# Altium PCB X-FLY(Mini).PcbDoc
Units mil, origin at the board's own origin, x right, y up, seen from the top; angles counter-clockwise.
Board outline 985 x 985 mil, 2 copper layers (Top Layer, Bottom Layer); 41 components, 47 nets, 207 pads, 45 vias.
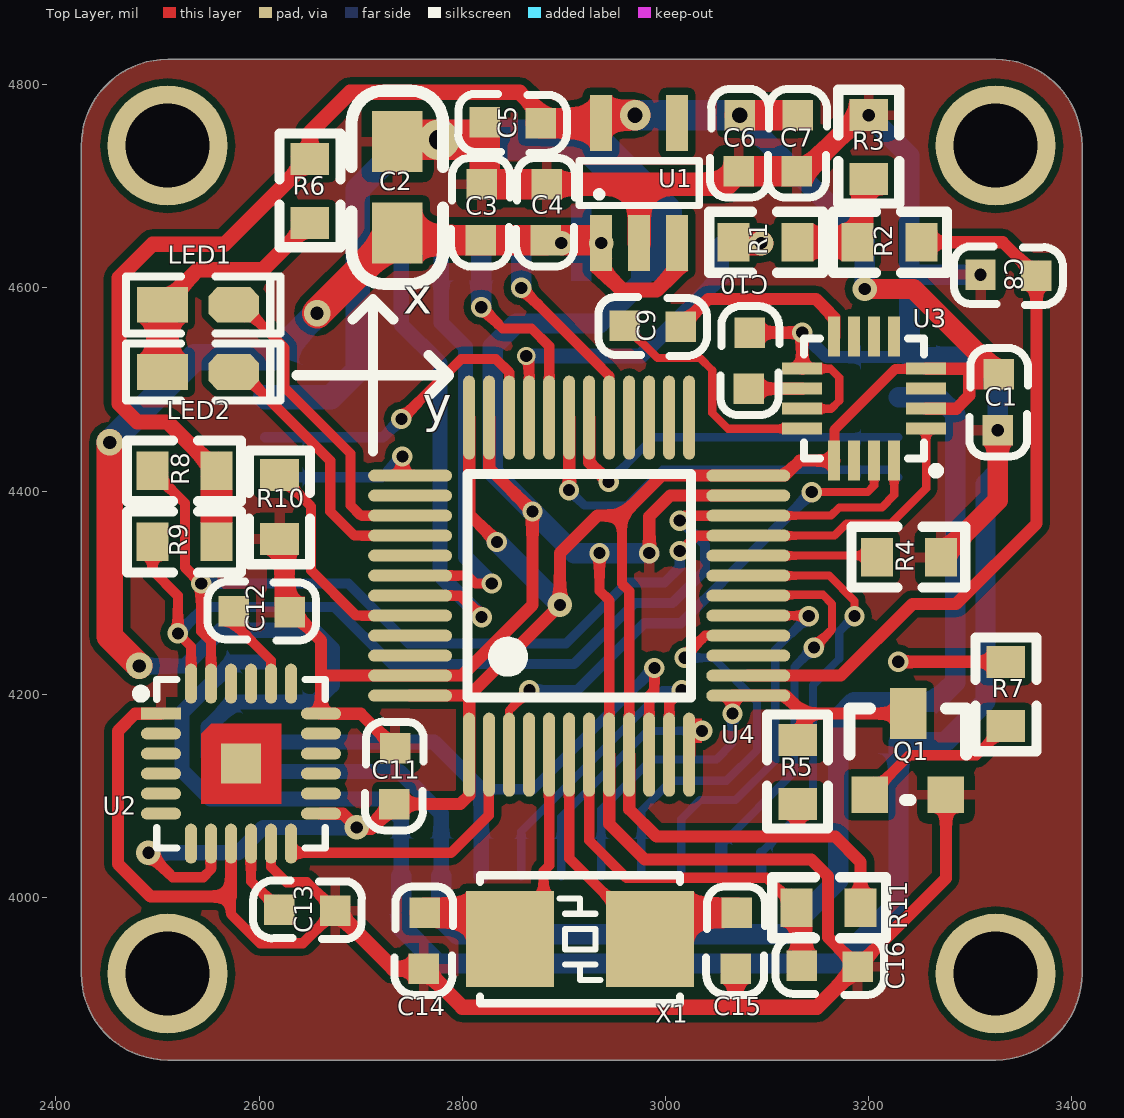
[diagram p0: Top Layer view]
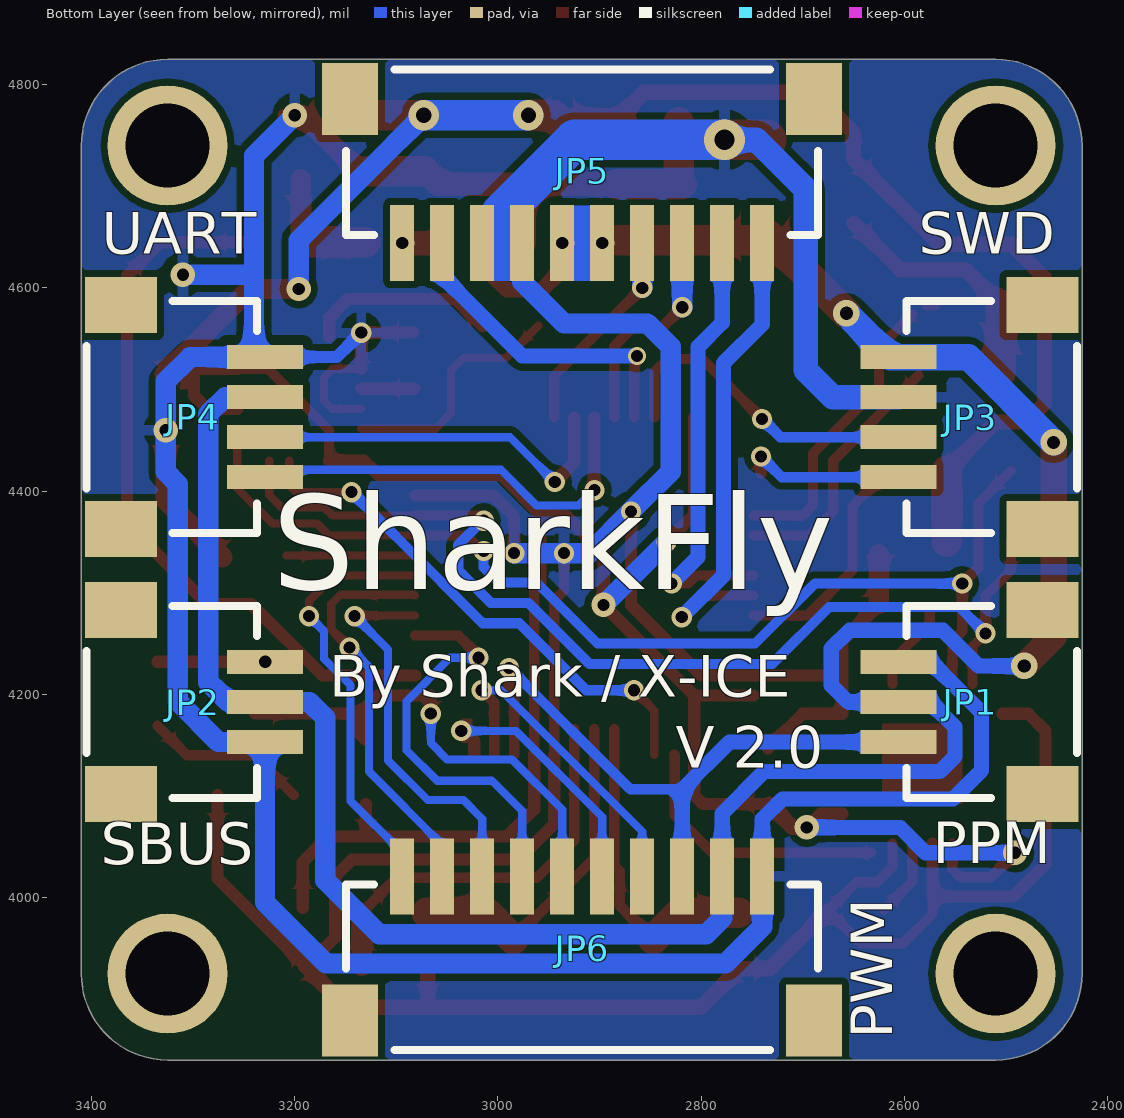
[diagram p1: Bottom Layer view, seen from below]
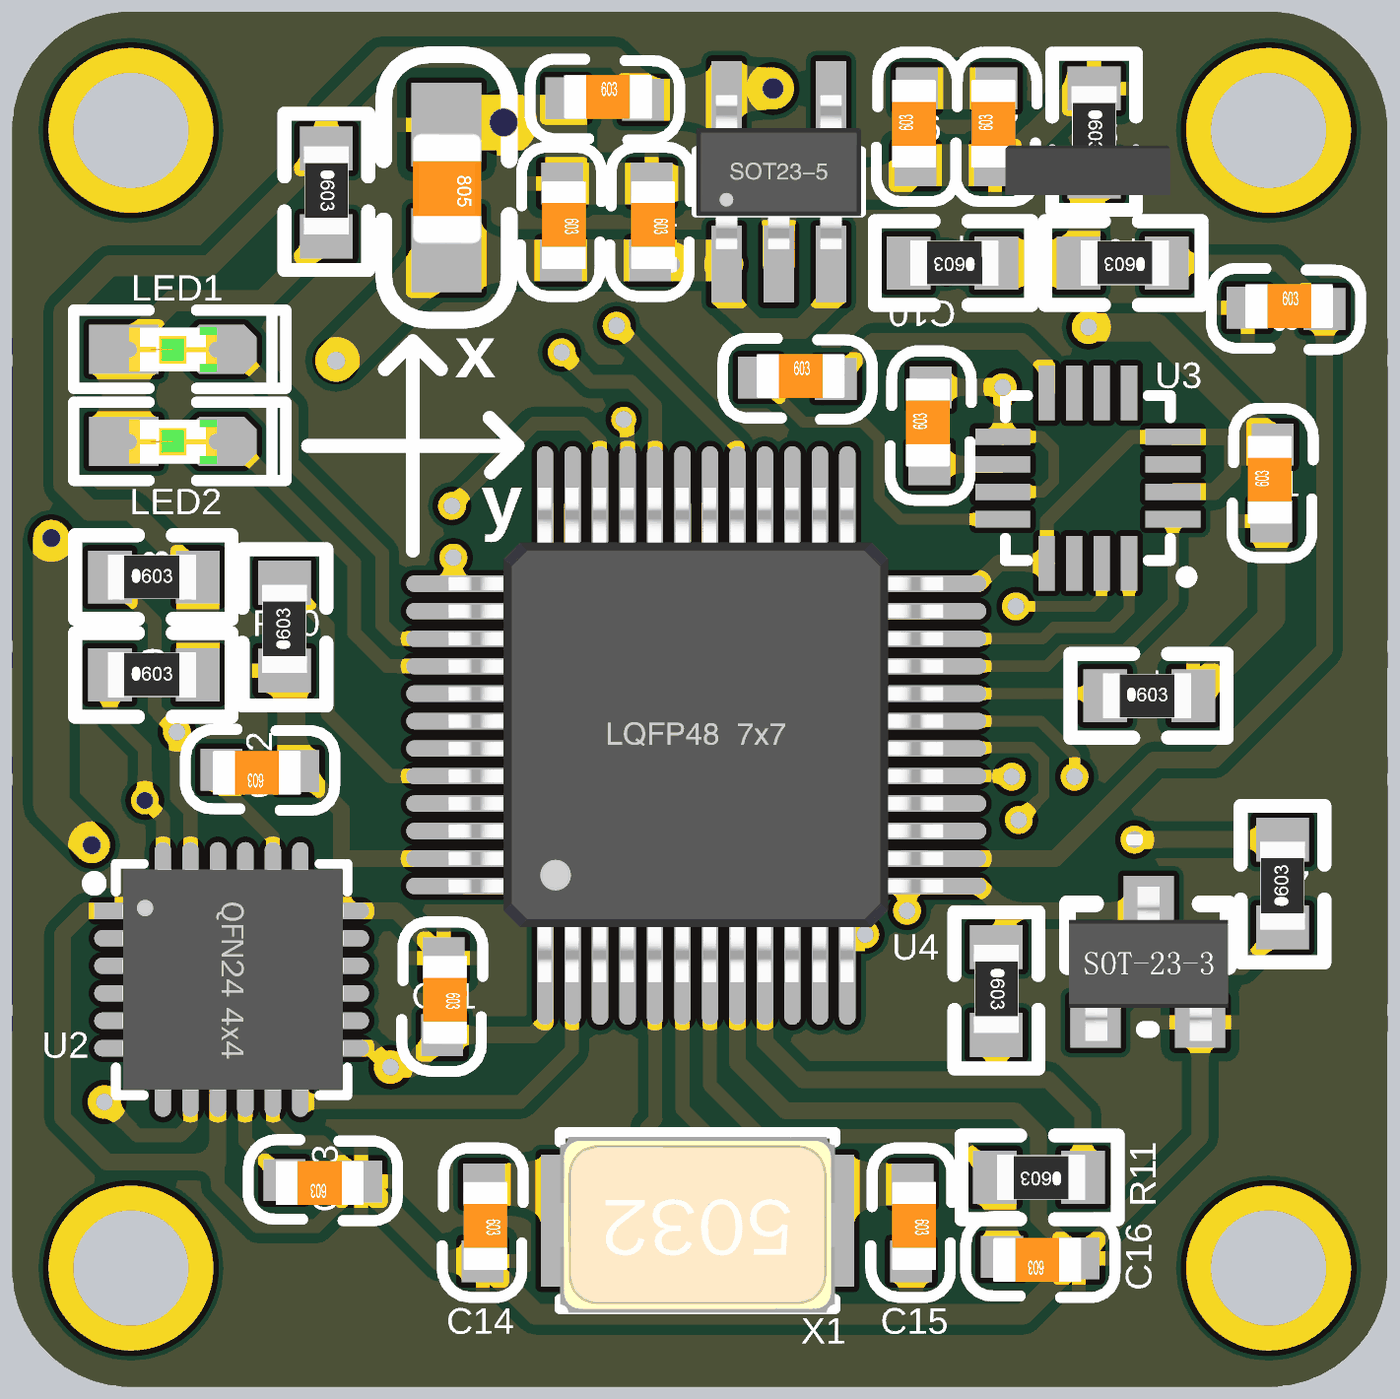
[diagram p2: 3D render of the assembled board from above, using the file's embedded part models]
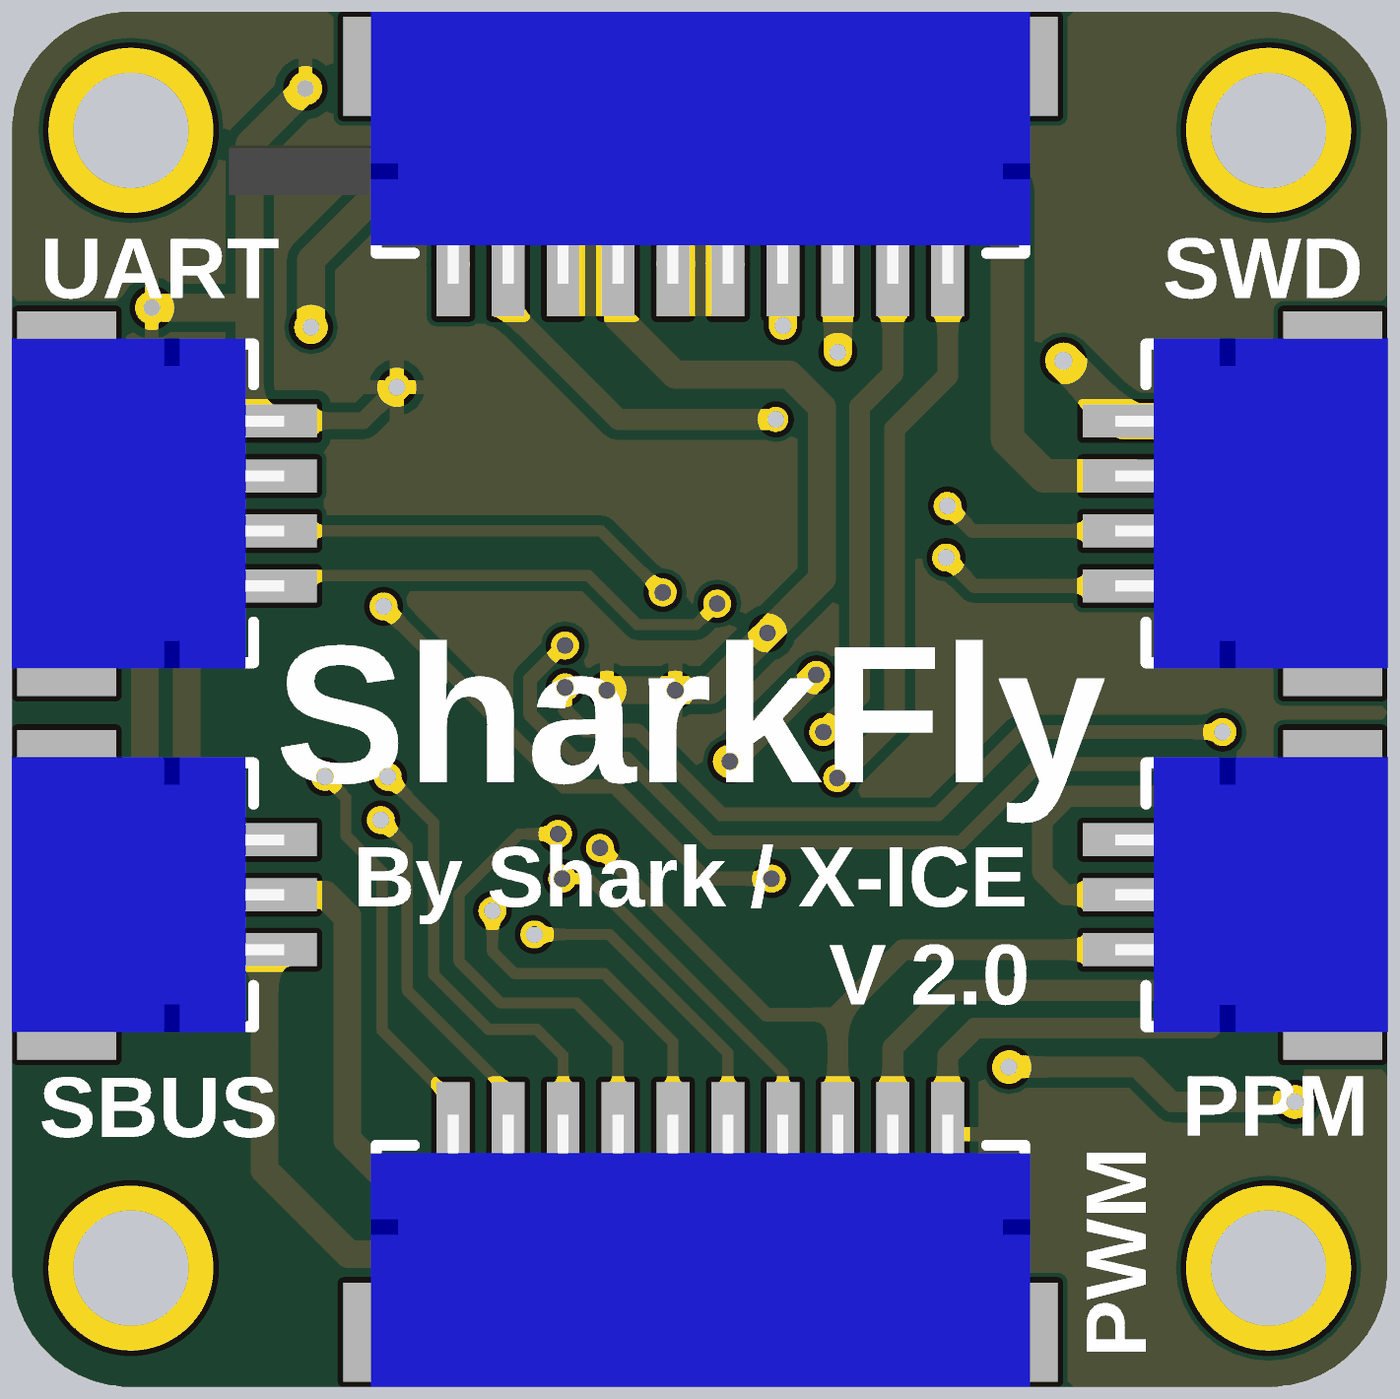
[diagram p3: 3D render of the assembled board from below, using the file's embedded part models]

## Layer stack, top to bottom
Top Solder: solder mask 0.4, Solder Resist, Dk 3.5
Top Layer: signal copper 1.4
Dielectric 1: dielectric 12.6, FR-4, Dk 4.8
Bottom Layer: signal copper 1.4
Bottom Solder: solder mask 0.4, Solder Resist, Dk 3.5

## Board outline
2425,3925 2425,4740 cw(c2510,4740) 2510,4825 3325,4825 cw(c3325,4740) 3410,4740 3410,3925 cw(c3325,3925) 3325,3840 2510,3840 cw(c2510,3925)

## Design rules (kind name [scope] priority, off if disabled: settings)
Clearance [All] p1: gap=7 ignorepadtopadclearanceinfootprint=FALSE
PolygonConnect [All] p1: connectstyle=Relief reliefconductorwidth=10 reliefentries=4 polygonreliefangle="90 Angle" airgapwidth=10
RoutingVias [All] p1: holewidth=15 width=30 viastyle="Through Hole" minholewidth=12 minwidth=18 maxholewidth=50 maxwidth=100
SolderMaskExpansion [All] p1: expansion=4
Width [All] p1: maxlimit=200 minlimit=8 preferedwidth=30
30 further rules are at their usual default settings.

## Components (designator, comment, footprint, x,y, rotation, side; value= is the part's Value field where it differs from the comment)
C1 "104" 0603C 3326.65,4459.79 r90 top
C2 "10uF" 0805C 2736.4,4743.29 r270 top
C3 "100nF" 0603C 2819.35,4702.21 r270 top
C4 "100nF" 0603C 2883.35,4702.21 r270 top
C5 "10uF" 0603C 2821.79,4763.35 r0 top
C6 "100nF" 0603C 3071.65,4714.79 r90 top
C7 "100nF" 0603C 3128.65,4714.79 r90 top
C8 "100nF" 0603C 3309.79,4613.35 r0 top
C9 "0.22uF" 0603C 2959.79,4563.35 r0 top
C10 "4.7uF" 0603C 3081.65,4500.79 r90 top
C11 "100nF" 0603C 2734.35,4147.21 r270 top
C12 "100nF" 0603C 2630.21,4280.65 r180 top
C13 "100nF" 0603C 2675.21,3986.65 r180 top
C14 "30pF" 0603C 2763.35,3985.21 r270 top
C15 "30pF" 0603C 3070.35,3985.21 r270 top
C16 "100nF" 0603C 3189.21,3931.65 r180 top
JP1 "PPM" SH1.0-3P-L 2534.87,4192.45 r90 bottom
JP2 "SBUS" SH1.0-3P-L 3300.13,4192.45 r270 bottom
JP3 "SWD下载" SH1.0-4P-L 2534.87,4472.76 r90 bottom
JP4 "USART1" SH1.0-4P-L 3300.13,4472.76 r270 bottom
JP5 "SH1.0-10P" SH1.0-10P-L 2917,4715 r0 bottom
JP6 "PWM" SH1.0-10P-L 2917,3950 r180 bottom
LED1 "蓝色" "LED 0603B" 2540,4583 r0 top
LED2 "绿色" "LED 0603G" 2540,4517 r0 top
Q1 "NPN" SOT-23 3236,4136 r0 top
R1 "10K" 0603R 3129.99,4645 r180 top
R2 "10K" 0603R 3251.99,4645 r180 top
R3 "1K" 0603R 3200,4770 r270 top
R4 "10K" 0603R 3208,4335 r0 top
R5 "10K" 0603R 3130,4154.99 r270 top
R6 "10K" 0603R 2650,4727 r270 top
R7 "1K" 0603R 3335,4169 r90 top
R8 "10K" 0603R 2495.01,4420 r0 top
R9 "10K" 0603R 2495.01,4350 r0 top
R10 "10K" 0603R 2620,4353 r90 top
R11 "10K" 0603R 3191.99,3990 r180 top
U1 "SPX3819" SOT23-5 2936.68,4644.14 r0 top
U2 "MPU6050" "QFN24 4x4" 2582.16,4131.74 r270 top
U3 "HMC5883" LPCC_16_0.5MM 3195.53,4490.98 r180 top
U4 "STM32F103C8T6" "LQFP48 7X7" 2915,4307 r0 top locked
X1 "8M" "OSC 5032-2P" 2915.9,3959 r180 top

## Footprints (in the part's own frame and the unit in brackets; to place one, negate y for a bottom-side part, rotate by r counter-clockwise, add the part's x,y. Pads: shape width x height; smd on the part's side, far side on the other; paste and mask are expansions set on the pad)
0603C [mil]
  rect 30x30 smd: 1(0.21,-0.35) 2(55.21,-1.35)
  silkscreen extent -26,-30 81,28, body extent -1,-15 62,17, height 12
0603R [mm]
  rect 0.8x0.965 smd: 1(0,0) 2(1.6,0)
  silkscreen extent -0.64,-0.76 2.21,0.76, body extent -0.04,-0.41 1.56,0.41, height 0.45
0805C [mil]
  rect 60x50 smd: 1(-0.71,-0.4) 2(89.29,-0.4)
  silkscreen extent -51,-45 139,45, body extent 6,-25 84,25, height 31
"LED 0603B" [mil] "蓝色0603LED"
  rect 50x35 smd: 1(-35,0.26)
  oct 50x35 smd: 2(35,0.26)
  silkscreen extent -71,-28 81,28, body extent -31,-16 32,16, height 24
"LED 0603G" [mil] "绿色0603LED"
  rect 50x35 smd: 1(-35,0.26)
  oct 50x35 smd: 2(35,0.26)
  silkscreen extent -71,-28 81,28, body extent -31,-16 32,16, height 24
LPCC_16_0.5MM [mm]
  rect 1x0.3 smd: 1(-1.55,0.75) 2(-1.55,0.25) 3(-1.55,-0.25) 4(-1.55,-0.75) 9(1.55,-0.75) 10(1.55,-0.25) 11(1.55,0.25) 12(1.55,0.75)
  rect 0.3x1 smd: 5(-0.75,-1.55) 6(-0.25,-1.55) 7(0.25,-1.55) 8(0.75,-1.55) 13(0.75,1.55) 14(0.25,1.55) 15(-0.25,1.55) 16(-0.75,1.55)
  silkscreen extent -1.87,-1.5 1.5,1.87, body extent -1.5,-1.5 1.5,1.5, height 0.9
"LQFP48 7X7" [mm]
  oval 0.3x2.1 smd: 1(-2.75,-4.227) 2(-2.25,-4.227) 3(-1.75,-4.227) 4(-1.25,-4.227) 5(-0.75,-4.227) 6(-0.25,-4.227) 7(0.25,-4.227) 8(0.75,-4.227) 9(1.25,-4.227) 10(1.75,-4.227) 11(2.25,-4.227) 12(2.75,-4.227) 25(2.75,4.202) 26(2.25,4.202) 27(1.75,4.202) 28(1.25,4.202) 29(0.75,4.202) 30(0.25,4.202) 31(-0.25,4.202) 32(-0.75,4.202) 33(-1.25,4.202) 34(-1.75,4.202) 35(-2.25,4.202) 36(-2.75,4.202)
  oval 2.1x0.3 smd: 13(4.227,-2.75) 14(4.227,-2.25) 15(4.227,-1.75) 16(4.227,-1.25) 17(4.227,-0.75) 18(4.227,-0.25) 19(4.227,0.25) 20(4.227,0.75) 21(4.227,1.25) 22(4.227,1.75) 23(4.227,2.25) 24(4.227,2.75) 37(-4.227,2.75) 38(-4.227,2.25) 39(-4.227,1.75) 40(-4.227,1.25) 41(-4.227,0.75) 42(-4.227,0.25) 43(-4.227,-0.25) 44(-4.227,-0.75) 45(-4.227,-1.25) 46(-4.227,-1.75) 47(-4.227,-2.25) 48(-4.227,-2.75)
  silkscreen extent -2.79,-2.79 2.79,2.79, body extent -4.51,-4.5 4.5,4.5, height 1.45
"OSC 5032-2P" [mm]
  rect 2.2x2.4 smd: 1(-1.75,0) 2(1.75,0)
  silkscreen extent -2.5,-1.6 2.5,1.6, body extent -2.5,-1.52 2.5,1.68, height 0.86
"QFN24 4x4" [mm]
  rect 0.3x1 smd: 1(-1.25,-2)
  oval 0.3x1 smd: 2(-0.75,-2) 3(-0.25,-2) 4(0.25,-2) 5(0.75,-2) 6(1.25,-2) 13(1.25,2) 14(0.75,2) 15(0.25,2) 16(-0.25,2) 17(-0.75,2) 18(-1.25,2)
  oval 1x0.3 smd: 7(2,-1.25) 8(2,-0.75) 9(2,-0.25) 10(2,0.25) 11(2,0.75) 12(2,1.25) 19(-2,1.25) 20(-2,0.75) 21(-2,0.25) 22(-2,-0.25) 23(-2,-0.75) 24(-2,-1.25)
  rect 1x1 smd: 25(0,0)
  Top Layer region: -1,1 1,1 1,-1 -0.75,-1 -1,-0.75
  silkscreen extent -2.11,-2.6 2.11,2.11, body extent -2.01,-1.98 2.01,2.04, height 0.98
SH1.0-3P-L [mm]
  rect 1.4x1.8 smd: 0(-2.3,-1.8) 0(2.3,-1.8)
  rect 0.6x1.9 smd: 1(-1,1.8) 2(0,1.8) 3(1,1.8)
  silkscreen extent -2.4,-2.67 2.4,1.6, body extent -2.5,-2.79 2.5,2.16, height 2.96
SH1.0-4P-L [mm]
  rect 1.4x1.8 smd: 0(-2.8,-1.8) 0(2.8,-1.8)
  rect 0.6x1.9 smd: 1(-1.5,1.8) 2(-0.5,1.8) 3(0.5,1.8) 4(1.5,1.8)
  silkscreen extent -2.9,-2.67 2.9,1.6, body extent -3,-2.79 3,2.16, height 2.96
SH1.0-10P-L [mm]
  rect 1.4x1.8 smd: 0(-5.8,-1.8) 0(5.8,-1.8)
  rect 0.6x1.9 smd: 1(-4.5,1.8) 2(-3.5,1.8) 3(-2.5,1.8) 4(-1.5,1.8) 5(-0.5,1.8) 6(0.5,1.8) 7(1.5,1.8) 8(2.5,1.8) 9(3.5,1.8) 10(4.5,1.8)
  silkscreen extent -5.9,-2.54 5.9,1.6, body extent -6,-2.79 6,2.16, height 2.96
SOT23-5 [mm]
  rect 0.55x1.4 smd: 1(0,0) 2(0.95,0) 3(1.9,0) 4(1.9,3) 5(0,3)
  silkscreen extent -0.55,0.94 2.45,2.06, body extent -0.55,0.27 2.45,3.08, height 1.15
SOT-23 [mil]
  rect 36x36 smd: B(-35,-35) E(40,-35)
  rect 36x50 smd: C(3,45)
  silkscreen extent -55,-40 60,50, body extent -54,-48 60,62, height 47

## Part data
C1 C2 C3 C4 C5 C6 C7 C8 C9 C10 C11 C12 C13 C14 C15 C16: library part CAP, "无极性电容"
JP1 JP2: library part "Header 3", "3P接插件", BOM名称=3P接插件, 厂商=JST
JP3 JP4: library part "Header 4", "4P接插件", BOM名称=4P接插件, 厂商=JST
JP5 JP6: library part "Header 10", "10P接插件", BOM名称=10P接插件, 厂商=JST
LED1 LED2: library part LED-SMD, "贴片LED", BOM名称=贴片LED, 学习资源=www.ooocke.com, 版权归属=源创客
Q1: "NPN三极管"
R1 R2 R3 R4 R5 R6 R7 R8 R9 R10 R11: library part RES
X1: library part XTAL-2P, "2脚无源脚晶振"

## Free pads (board coordinates)
  round 118.11 hole 82.68: 1(2510,4740) 2(3325,4740) 3(2510,3925) 4(3325,3925)

## Via types
v1: diameter 20, hole 12, Top Layer to Bottom Layer, 28 vias
v2: diameter 24, hole 12, Top Layer to Bottom Layer, 10 vias
v3: diameter 26, hole 13, Top Layer to Bottom Layer, 3 vias
v4: diameter 30, hole 15, Top Layer to Bottom Layer, 2 vias
v5: diameter 18, hole 12, Top Layer to Bottom Layer, 1 vias
v6: diameter 40, hole 20, Top Layer to Bottom Layer, 1 vias

## Nets (pads, with @x,y where several pads share a name; then routed paths per layer and width w, separated by ;. In a path a pad name is that pad's centre, name@x,y a point inside that pad or via, vN(x,y) a via of type N, cw(c..) or ccw(c..) an arc to the next point about the centre after c; other vN are vias at no path point)
3.3V-A: C1.2 C5.2 C6.2 C7.2 C11.2 R5.2 R6.1 R8.2 R9.2 R11.1 U1.5 U2.8 U2.13 U3.2 U3.4 U3.13 U4.1 U4.9 U4.24 U4.36 U4.48 | length 3697.2
  Top Layer w10: v2(2491,4044) 2515,4020 2545,4020 2552.63,4027.63 U2.8 ; 2957,4376 2957,4309 2964.21,4301.79 U4.9 ; U3.13 3166.19,4430.14 3166.19,4460.19 3226.31,4520.31 3235.93,4520.31 3236.12,4520.5 U3.4
  Top Layer w12: U2.13 2682.47,4082.53 v2(2696,4069) ; C11.2 2798,4092 2806.73,4100.73 U4.1 2806.73,4197 ; U4.48 2806.73,4198.73 v2(2896,4288) 2896,4339 2933,4376 2957,4376 2996.27,4415.27 U4.24 3117.27,4415.27 3132,4430 U3.13 U3.13 ; U4.36 2806.73,4377.27 v1(2834,4350) ; U4.9 2964.21,4086.79 2991,4060 3129,4060 ; R5.2 3130,4061 3129,4060 ; R11.1 3192,4035 3167,4060 3129,4060 ; U3.2 3286.13,4481.13 3299,4494 3299,4519.5 3298,4520.5 U3.4
  Top Layer w15: R8.2 2510,4468 2480,4468 2462,4486 2462,4610 2495,4643 2566,4643 R6.1 2650,4753 2689.5,4792.5 2856.5,4792.5 2877,4772 C5.2 ; v2(2696,4069) 2710,4069 C11.2 ; U1.5@2936.44,4762 U1.5
  Top Layer w20: v2(3196,4599) 3244,4599 C1.2
  Top Layer w30: R9.2 R8.2 ; C5.2 U1.5@2936.44,4762 ; U1.5@2944.44,4770 v4(2970,4770) ; v4(3073,4770) C7.2
  Bottom Layer w15: v2(2491,4044) 2579,4044 2604,4069 v2(2696,4069)
  Bottom Layer w20: v1(2834,4350) v2(2896,4288) ; v4(3073,4770) 3196,4647 v2(3196,4599)
  Bottom Layer w30: v4(2970,4770) v4(3073,4770)
ADC_IN2: U4.15
BEEP_IN: JP5.9 U4.33 | length 318.5
  Top Layer w10: v5(2863,4533) 2865.79,4530.21 U4.33
  Bottom Layer w15: v5(2863,4533) 2976,4533 3054.8,4611.8 JP5.9
FLASH_CS: U4.25
FLASH_MISO: U4.27
FLASH_MOSI: U4.28
FLASH_SCK: U4.26
GND: C1.1 C2.1 C3.1 C4.1 C5.1 C6.1 C7.1 C8.1 C10.2 C11.1 C12.1 C13.1 C14.2 C15.2 C16.1 JP1.3 JP2.3 JP3.3 JP4.1 JP5.7 JP5.8 JP6.10 Q1.E R3.1 R4.2 R10.1 U1.2 U2.1 U2.9 U2.11 U2.18 U3.9 U3.11 U4.8 U4.23 U4.35 U4.47 | length 7140.9
  Top Layer w8: U3.11 3134.64,4481 3163,4481 3171,4489 3171,4512 3162.5,4520.5 U3.9
  Top Layer w10: 2572.32,4001 2572.32,3983.68 2601,3955 2643,3955 C13.1 2647,4015 2627,4015 2611.68,4030.32 U2.11 ; 2660.9,4221 2663.48,4218.42 ; v1(2935,4339) 2935,4302 2944.53,4292.47 U4.8
  Top Layer w12: U2.1 2477.95,4180.95 2461,4164 2461,4033 2493,4001 2572.32,4001 U2.9 ; C12.1@2625,4289 2660.9,4253.1 2660.9,4221 U2.18 2700.05,4180.95 C11.1 ; 2663.48,4218.42 U4.47 2799.55,4218.42 2869,4287.87 v1(2869,4380) 2826.42,4422.58 U4.35 ; U4.8 2944.53,4072.47 2979.46,4037.54 3143.46,4037.54 3160,4021 3160,3961 C16.1 3276,4019 Q1.E ; v1(2984,4339) 2984,4375 3004.58,4395.58 U4.23 ; C10.2 v1(3134.5,4556) U3.9 ; v2(3200,4770) R3.1@3211,4770
  Top Layer w15: C13.1 2732,3930 C14.2 2800,3892 3149,3892 C16.1 ; 3069,3895 C15.2
  Top Layer w20: C12.1@2625,4289 R10.1@2625,4338 ; C7.1 3137,4715 3192,4770 v2(3200,4770) ; R4.2 3327,4391.01 v2(3327,4460)
  Top Layer w23: C4.1 2974.09,4702 ; U1.2 2974.09,4702 ; C6.1 3059,4702 2974.09,4702
  Top Layer w30: C5.1 2822,4705 C3.1 C4.1 ; C6.1 C7.1
  Top Layer w40: C2.1@2736,4745.71 v6(2777,4745.71) 2816,4745.71
  Bottom Layer w12: v1(3134.5,4556) 3158.5,4532 3229.09,4532 JP4.1
  Bottom Layer w15: JP1.3 2573.82,4231.82 2524,4182 2524,4125 2552,4097 2720,4097 2739.84,4077.16 JP6.10
  Bottom Layer w20: JP6.10 2739.84,3971.16 2776,3935 3169,3935 3229.27,3995.27 JP2.3 3275.08,4153.08 3315,4193 3315,4407 3327,4419 v2(3327,4460) 3327,4508 3303,4532 3240,4532 3240,4614 ; JP5.7 2976.05,4606.06 2935,4565 2853,4565 2830,4542 2830,4419 v1(2869,4380) 2910,4339 v1(2935,4339) v1(2984,4339) ; v2(3200,4770) 3240,4730 3240,4614 ; v2(3310,4613) 3241,4613 3240,4614
  Bottom Layer w24: JP3.3 2670.45,4492.45 2697,4519 2697,4697 2745.71,4745.71 v6(2777,4745.71)
  Bottom Layer w40: v6(2777,4745.71) 2924.29,4745.71 2996,4674 2996,4644
LED0: LED1.2 U4.39 | length 299.4
  Top Layer w10: LED1.2@2570,4583 LED1.2@2578,4583 ; LED1.2@2592,4574 2625,4541 2625,4502 2690,4437 2690,4386 2700.1,4375.9 U4.39
LED1: LED2.2 U4.40 | length 257.2
  Top Layer w10: LED2.2@2586,4514 2670,4430 2670,4380 2693.79,4356.21 U4.40
MAG_DRDY: U3.15 U4.3 | length 519
  Top Layer w8: U4.3 2846.1,4184.1 v1(2866,4204) ; v1(3144,4399) 3199,4399 3205.37,4405.37 U3.15
  Bottom Layer w10: v1(2866,4204) 2913,4204 2979,4270 3015,4270 3021,4276 ; 3021.04,4276 3056,4310.96 ; 3056,4311 v1(3144,4399)
MPU_INT: U2.12 U4.2 | length 268.1
  Top Layer w10: U2.12@2633,4044 2789,4044 2826,4081 2826,4140.17 U4.2
NetC9_1: C9.1 U3.12 | length 241.2
  Top Layer w8: C9.1 2992,4531 3034,4531 3046,4519 3046,4477 3061.55,4461.45 U3.12
NetC9_2: C9.2 U3.8 | length 188.6
  Top Layer w12: C9.2 3042,4589 3148,4589 3166,4571 U3.8
NetC10_1: C10.1 U3.10 | length 52.6
  Top Layer w10: C10.1 C10.1@3082.18,4500.82
  Top Layer w12: C10.1@3082.18,4500.82 U3.10
NetC12_2: C12.2 U2.20 | length 86.7
  Top Layer w10: C12.2 2575,4270 2611.68,4233.31 U2.20
NetC13_2: C13.2 U2.10 | length 76.6
  Top Layer w10: U2.10 2592,4016 C13.2
NetC14_1: C14.1 U4.5 X1.2 | length 317.9
  Top Layer w10: X1.2 2880,3992 2880,4026 2885.74,4031.74 2885.47,4032.01 U4.5 ; U4.5@2885.47,4165.58 U4.5 ; U4.5@2885.74,4140.31 U4.5
  Top Layer w30: C14.1 2821,3985 X1.2
NetC15_1: C15.1 U4.6 X1.1 | length 335.9
  Top Layer w10: U4.6@2905.16,4165.58 U4.6 ; U4.6@2905.43,4140.31 U4.6 ; X1.1 2905.16,4038.64 U4.6
  Top Layer w30: X1.1 3010.8,3985 C15.1
NetC16_2: C16.2 R11.2 U4.7 | length 400.4
  Top Layer w10: U4.7@2924.84,4165.58 U4.7 ; U4.7@2925.11,4140.31 U4.7 ; R11.2@3134,3985 R11.2 3099.46,4019.54 2961.46,4019.54 2924.84,4056.16 U4.7
  Top Layer w20: C16.2 R11.2@3134,3985
NetJP2_1: JP2.1 R7.2 | length 106
  Top Layer w12: v1(3229,4231.99) R7.2
NetLED1_1: LED1.1 LED2.1 R6.2 | length 244.4
  Top Layer w15: LED1.1 2539.75,4618 2603.99,4618 R6.2
  Top Layer w30: LED2.1 LED1.1
NetQ1_B: Q1.B R7.1 | length 162.2
  Top Layer w10: Q1.B 3240,4140 3306,4140 R7.1
NetR1_1: R1.1 R2.2 R3.2 | length 110
  Top Layer w20: R2.2@3194,4656 R3.2@3194,4707.01
  Top Layer w30: R1.1 R2.2
NetR4_1: R4.1 U4.20 | length 126.6
  Top Layer w8: U4.20 R4.1@3208,4336.53
NetR10_2: R10.2 U4.44 | length 222.9
  Top Layer w10: R10.2 2651,4384.99 2651,4322 2695.53,4277.47 U4.44
POWER_ADC: C8.2 R2.1 U4.14 | length 716.2
  Top Layer w12: U4.14 3172.42,4218.42 3243,4289 3286,4289 3365,4368 C8.2 3332,4645 R2.1
PWM_IN1/PPM: JP1.1 JP6.8 U4.10 | length 625.2
  Top Layer w10: U4.10 2983.9,4198.9 2989,4204 v1(2989,4226)
  Bottom Layer w10: 2818.57,4106.57 2869.57,4106.57 v1(2989,4226)
  Bottom Layer w15: JP1.1 2772.07,4153.08 2818.57,4106.57 JP6.8
PWM_IN2: JP6.7 U4.11 | length 328.3
  Top Layer w10: U4.11 3003.58,4191.58 v1(3016,4204)
  Bottom Layer w8: JP6.7 2857.95,4064.95 2997,4204 v1(3016,4204)
PWM_IN3: JP6.6 U4.12 | length 245.6
  Top Layer w12: U4.12 U4.12@3023.27,4154
  Bottom Layer w8: JP6.6 2897.32,4079.32 2982,4164 v1(3036,4164)
PWM_IN4/SBUS: JP6.5 Q1.C R5.1 U4.13 | length 477.8
  Top Layer w12: v1(3066,4181) 3066,4198.73 U4.13 3118.27,4198.73 3136,4181 ; R5.1 3136,4160.99 3136,4181 ; Q1.C 3136,4181
  Bottom Layer w8: JP6.5 2936.68,4086.68 2986,4136 3050,4136 3066,4152 v1(3066,4181)
PWM_IN5: JP6.4 U4.16 | length 412.4
  Top Layer w10: v1(3019,4236) 3019,4238 3038.79,4257.79 U4.16
  Bottom Layer w8: JP6.4 2976.05,4085.05 3006,4115 3060,4115 3090,4145 3090,4193 3047,4236 v1(3019,4236)
PWM_IN6: JP6.3 U4.17 | length 388.4
  Top Layer w8: U4.17 3140.53,4277.47 v1(3141,4277)
  Bottom Layer w8: JP6.3 3015.43,4077.43 3034,4096 3069,4096 3108,4135 3108,4244 v1(3141,4277)
PWM_IN7: JP6.2 U4.18 | length 400
  Top Layer w8: U4.18 3082.26,4298 3155,4298 3164,4289 3164,4264 v1(3146,4246)
  Bottom Layer w8: JP6.2@3054.8,4051.8 3127,4124 3127,4227 v1(3146,4246)
  Bottom Layer w12: JP6.2 JP6.2@3054.8,4051.8
PWM_IN8: JP6.1 U4.19 | length 424
  Top Layer w8: U4.19 3161.16,4316.84 3186,4292 v1(3186,4277)
  Bottom Layer w8: JP6.1@3094.16,4044.16 3145,4095 3145,4209 3171,4235 3171,4262 v1(3186,4277)
  Bottom Layer w10: JP6.1 JP6.1@3094.16,4044.16
PWM_OUT1: JP5.4 U4.29 | length 207.6
  Top Layer w10: v1(2857.95,4600.06) 2932.24,4525.76 2942.75,4515.27 2944.53,4513.47 U4.29
  Bottom Layer w20: v1(2857.95,4600.06) JP5.4
PWM_OUT2: JP5.3 U4.32 | length 216.1
  Top Layer w10: v1(2818.57,4581) 2839.57,4560 2868,4560 2885.47,4542.53 U4.32
  Bottom Layer w20: v1(2818.57,4581) JP5.3
PWM_OUT3: JP5.2 U4.42 | length 439.4
  Top Layer w10: U4.42 2805.16,4316.84 2813,4309 v1(2829,4309)
  Bottom Layer w15: JP5.2 2779.2,4565.8 2803,4542 2803,4335 v1(2829,4309)
PWM_OUT4: JP5.1 U4.43 | length 480.1
  Top Layer w10: U4.43 2797.84,4297.16 v1(2819,4276)
  Bottom Layer w15: JP5.1 2739.84,4564.16 2778,4526 2778,4317 v1(2819,4276)
SCL: R8.1 U2.23 U3.1 U4.21 | length 1102.8
  Top Layer w8: U4.21 3166.21,4356.21 3178,4368 3222,4368 3256.55,4402.55 U3.1
  Top Layer w10: R8.1 2527,4388.01 2527,4325 v1(2543,4309) 2543,4262 2552.63,4252.37 U2.23 ; v1(3014,4341) 3015.11,4341 3030.33,4356.21 U4.21
  Bottom Layer w10: v1(2543,4309) 2688,4309 2747,4250 2902,4250 2962,4310 2999,4310 3014,4325 v1(3014,4341)
SDA: R9.1 U2.24 U3.16 U4.22 | length 1061.6
  Top Layer w8: U4.22 3162.9,4375.9 3171,4384 3213,4384 3225.06,4396.06 U3.16
  Top Layer w10: R9.1 2495.01,4321.99 2520,4297 v1(2520,4260) 2532.94,4247.06 U2.24 ; v1(3014,4371) 3018.9,4375.9 U4.22
  Bottom Layer w10: v1(2520,4260) 2546,4286 2674,4286 2730,4230 2910,4230 2970,4290 3007,4290 3039,4322 3039,4347.11 3015.11,4371 v1(3014,4371)
SWCLK: JP3.1 U4.37 | length 160
  Top Layer w12: U4.37@2741,4418 v1(2741,4434)
  Bottom Layer w10: JP3.1 2720.71,4413.71 ; 2721,4413.71 2720.71,4413.71 ; v1(2741,4434) 2720.71,4413.71
SWDIO: JP3.2 U4.34 | length 322.1
  Top Layer w10: v1(2740,4471) 2799,4530 2833,4530 2846.1,4516.9 U4.34
  Bottom Layer w10: JP3.2 2722.08,4453.08 v1(2740,4471)
UART1_RX: JP4.4 U4.31 | length 419.5
  Top Layer w12: v1(2905,4401) 2905.16,4401.16 U4.31
  Bottom Layer w8: v1(2905,4401) 2920,4386 2962,4386 2997,4421 3221.98,4421 JP4.4
UART1_TX: JP4.3 U4.30 | length 374.9
  Top Layer w12: U4.30 2924.84,4428.16 v1(2944,4409)
  Bottom Layer w8: v1(2944,4409) 2988.08,4453.08 JP4.3
VCC-5V: C2.2 C3.2 C4.2 JP1.2 JP2.2 JP3.4 JP4.2 JP5.5 JP5.6 JP6.9 U1.1 U1.3 | length 2699.2
  Top Layer w15: v2(2936.68,4644.14) 2936.68,4618.31 2957,4598 2991,4598 3011.49,4618.49 U1.3
  Top Layer w26: v3(2453,4448) 2453,4257 v3(2482,4228)
  Top Layer w30: v3(2657,4575) C2.2 2743,4647 C3.2 C4.2
  Bottom Layer w15: v3(2482,4228) 2527,4228 2562,4263 2654,4263 2672,4245 2672,4209 2655.45,4192.45 JP1.2 2574.45,4192.45 2550,4168 2550,4139 2565,4124 2738,4124 2779.2,4082.8 JP6.9
  Bottom Layer w20: JP6.9 2779.2,3979.8 2795,3964 3117,3964 3170,4017 3170,4177 3185.45,4192.45 JP2.2 3265.45,4192.45 3285,4212 3285,4476 3268.55,4492.45 JP4.2
  Bottom Layer w26: v3(2453,4448) 2536.82,4531.82 JP3.4 2613.82,4531.82 v3(2657,4575)
  other v2: 2897.32,4644.14
VCC-BAT: JP5.10 R1.2 | length 27.5
  Top Layer w24: R1.2 3067.87,4644.13 v2(3094.16,4644.13)
pads on no net: JP1.0 JP2.0 JP3.0 JP4.0 JP5.0 JP6.0 U1.4 U2.2 U2.3 U2.4 U2.5 U2.6 U2.7 U2.14 U2.15 U2.16 U2.17 U2.19 U2.21 U2.22 U2.25 U3.3 U3.5 U3.6 U3.7 U3.14 U4.4 U4.38 U4.41 U4.45 U4.46

## Polygon pours and split planes (outlines as drawn)
GND on Top Layer "GND_L01_P000" (solid, remove dead copper, pour order 0): 2425,3925 2425,4740 cw(c2510,4740) 2510,4825 3325,4825 cw(c3325,4740) 3410,4740 3410,3925 cw(c3325,3925) 3325,3840 2510,3840 cw(c2510,3925)
GND on Bottom Layer "GND_L02_P001" (solid, remove dead copper, pour order 1): 2425,3925 2425,4740 cw(c2510,4740) 2510,4825 3325,4825 cw(c3325,4740) 3410,4740 3410,3925 cw(c3325,3925) 3325,3840 2510,3840 cw(c2510,3925)

## Other copper
Top Layer:
  rectangle net 3.3V-A: 3298,4500 3313,4526
  rectangle net VCC-5V: 2896,4632 2932,4662
  rectangle net PWM_IN3: 3025,4152 3036,4176
Bottom Layer:
  rectangle net VCC-5V: 2907,4607 2927,4681
  rectangle net GND: 2985,4607 3007,4680

## Silkscreen, mask and mechanical layers (free items; w line width, h text height)
Top Overlay:
  lines w10: 2637,4514 2787,4514 ; 2692,4569 2712,4589 ; 2712,4439 2712,4589 ; 2732,4569 2712,4589 ; 2767,4534 2787,4514 ; 2768,4495 2787,4514
  text "x" at 2742,4563 h60
  text "y" at 2761,4456 h60
Bottom Overlay:
  text "SWD" at 2586,4620 h70
  text "UART" at 3390,4620 h70
  text "SharkFly" at 3222,4273 h160
  text "By Shark / X-ICE" at 3166,4184 h70
  text "V 2.0" at 2825,4114 h70
  text "PPM" at 2572,4020 h70
  text "SBUS" at 3391,4019 h70
  text "PWM" at 2598,3861 h70 r270
Mechanical 1:
  the board outline again, w10